# Altium PCB ECG_NEMO_final.PcbDoc (part 1 of 2)
Units mm, origin at the board's own origin, x right, y up, seen from the top; angles counter-clockwise.
Board outline 221.18 x 156.18 mm, 4 copper layers (Top Layer, Signal Layer 1, Signal Layer 2, Bottom Layer), stack 0.778 mm thick; 203 components, 106 nets, 642 pads, 55 vias.
Unrouted connection lines stored in the file: 130.
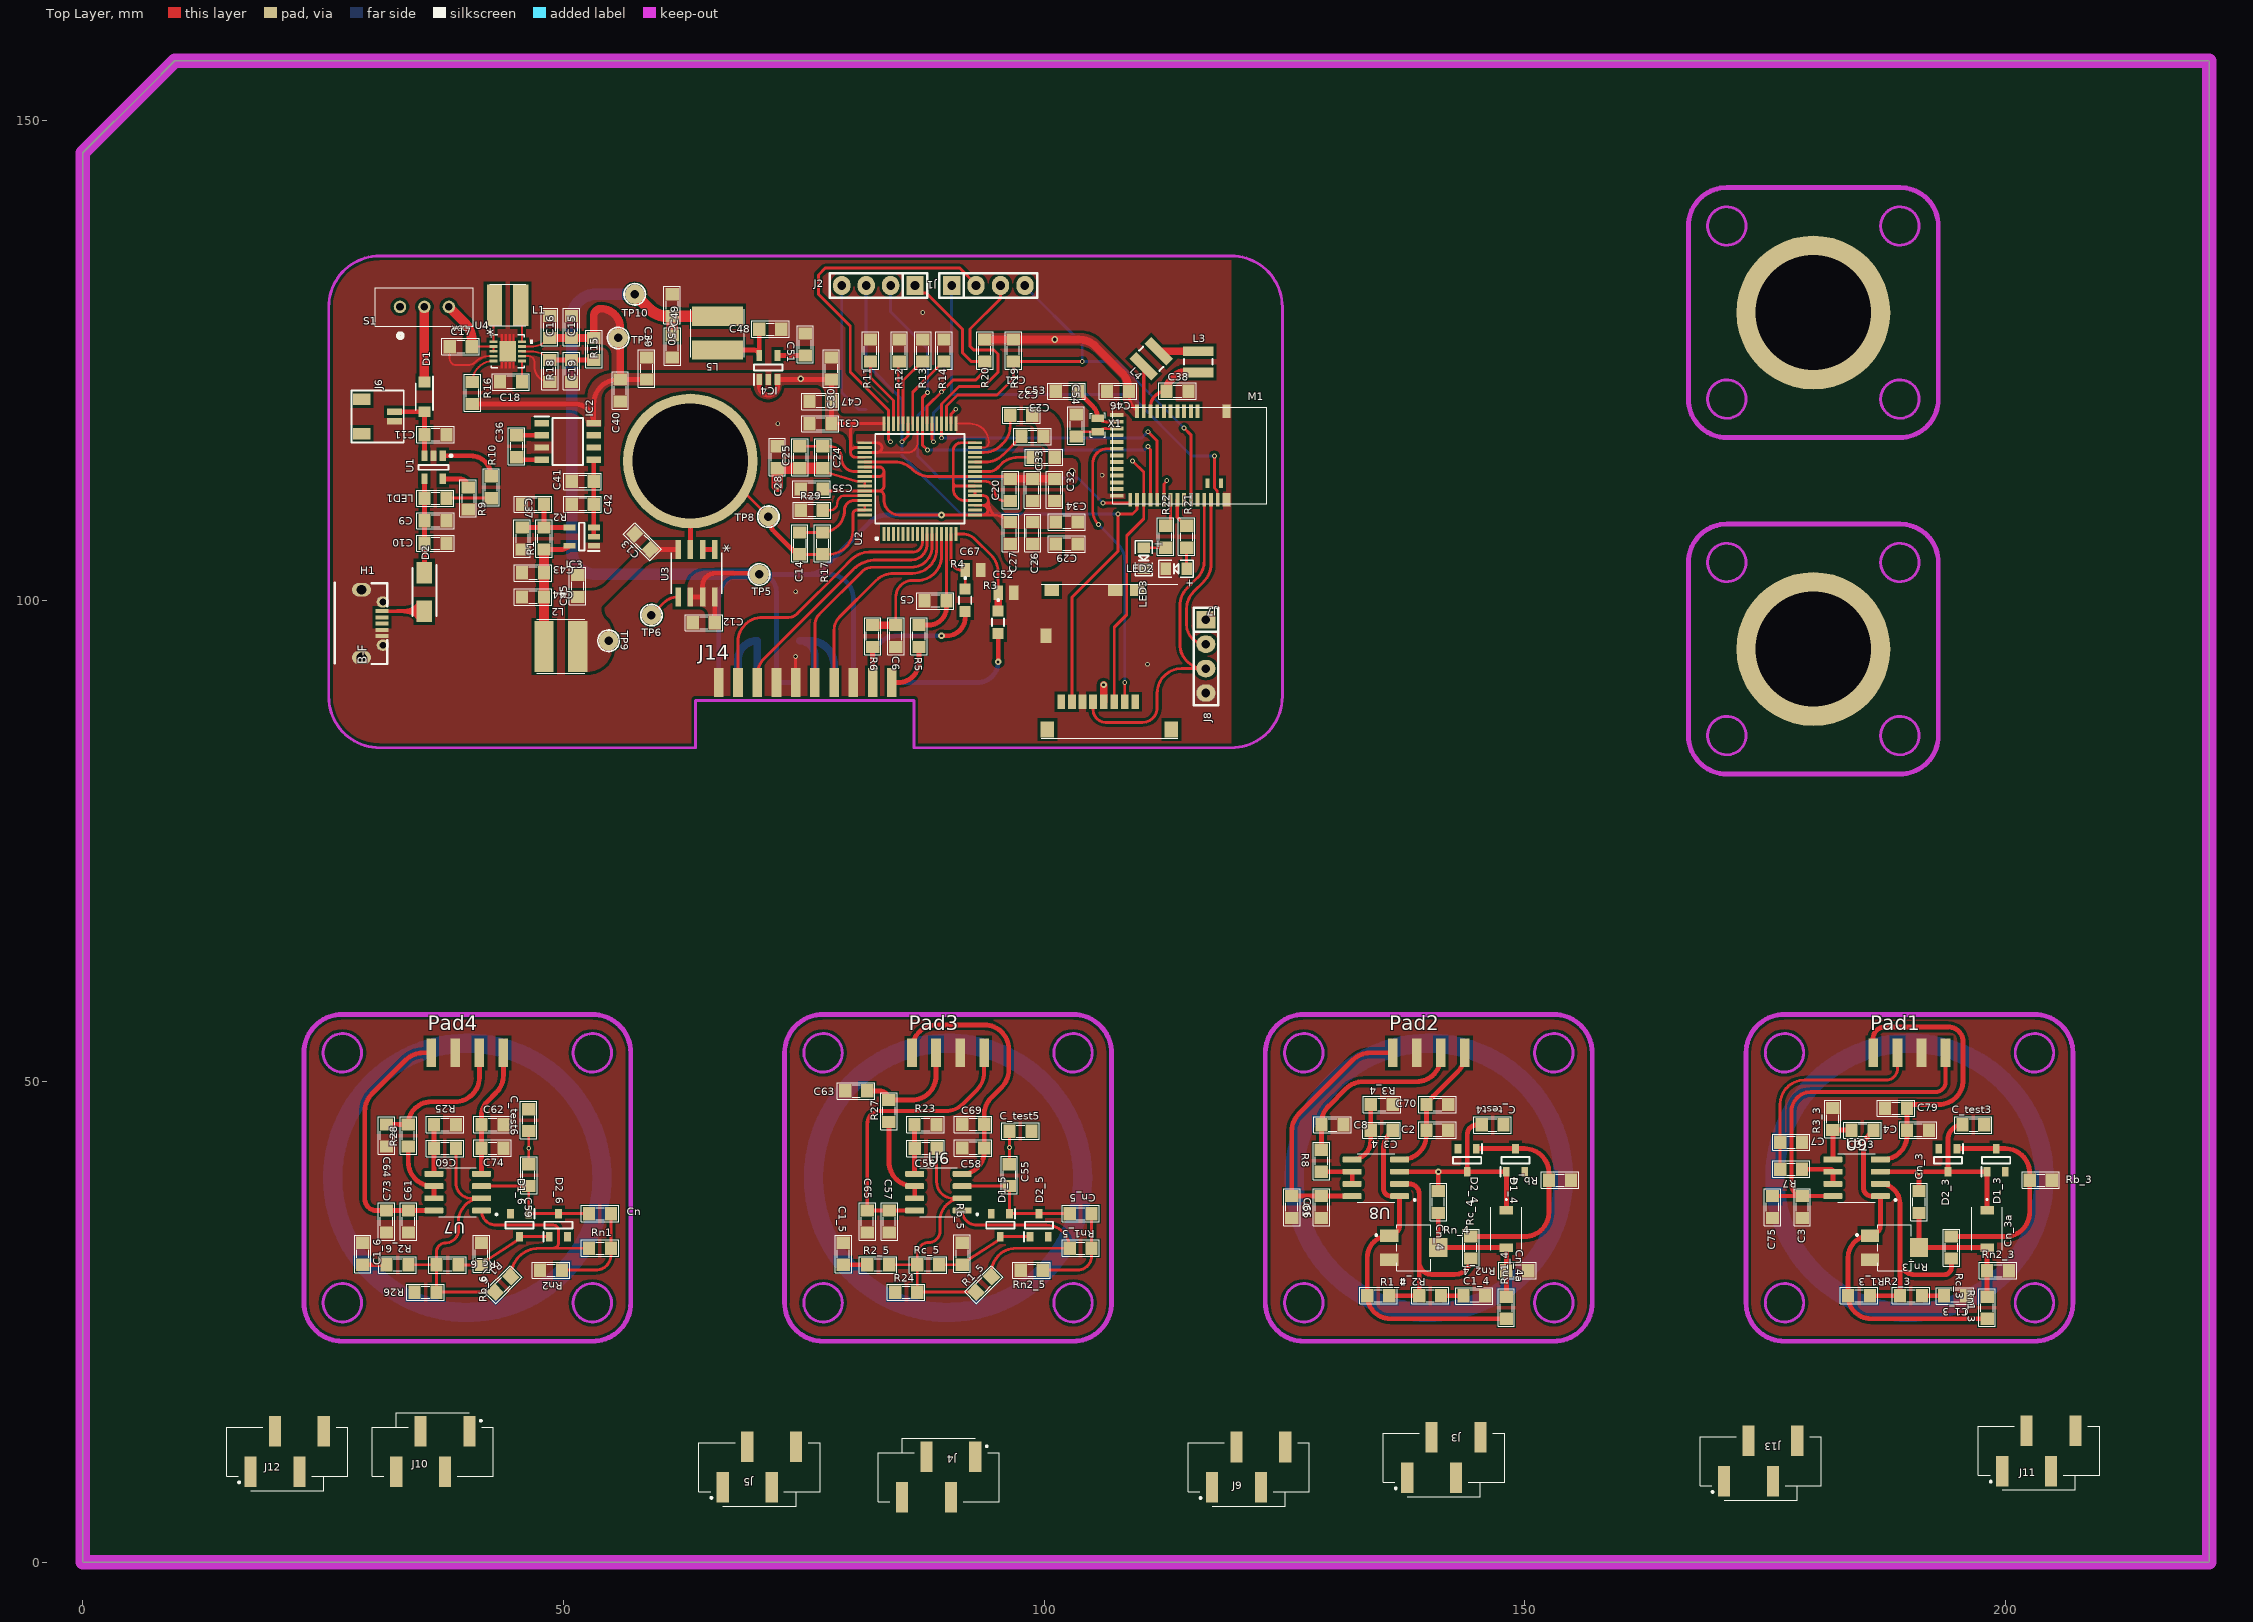
[diagram p0: Top Layer view]
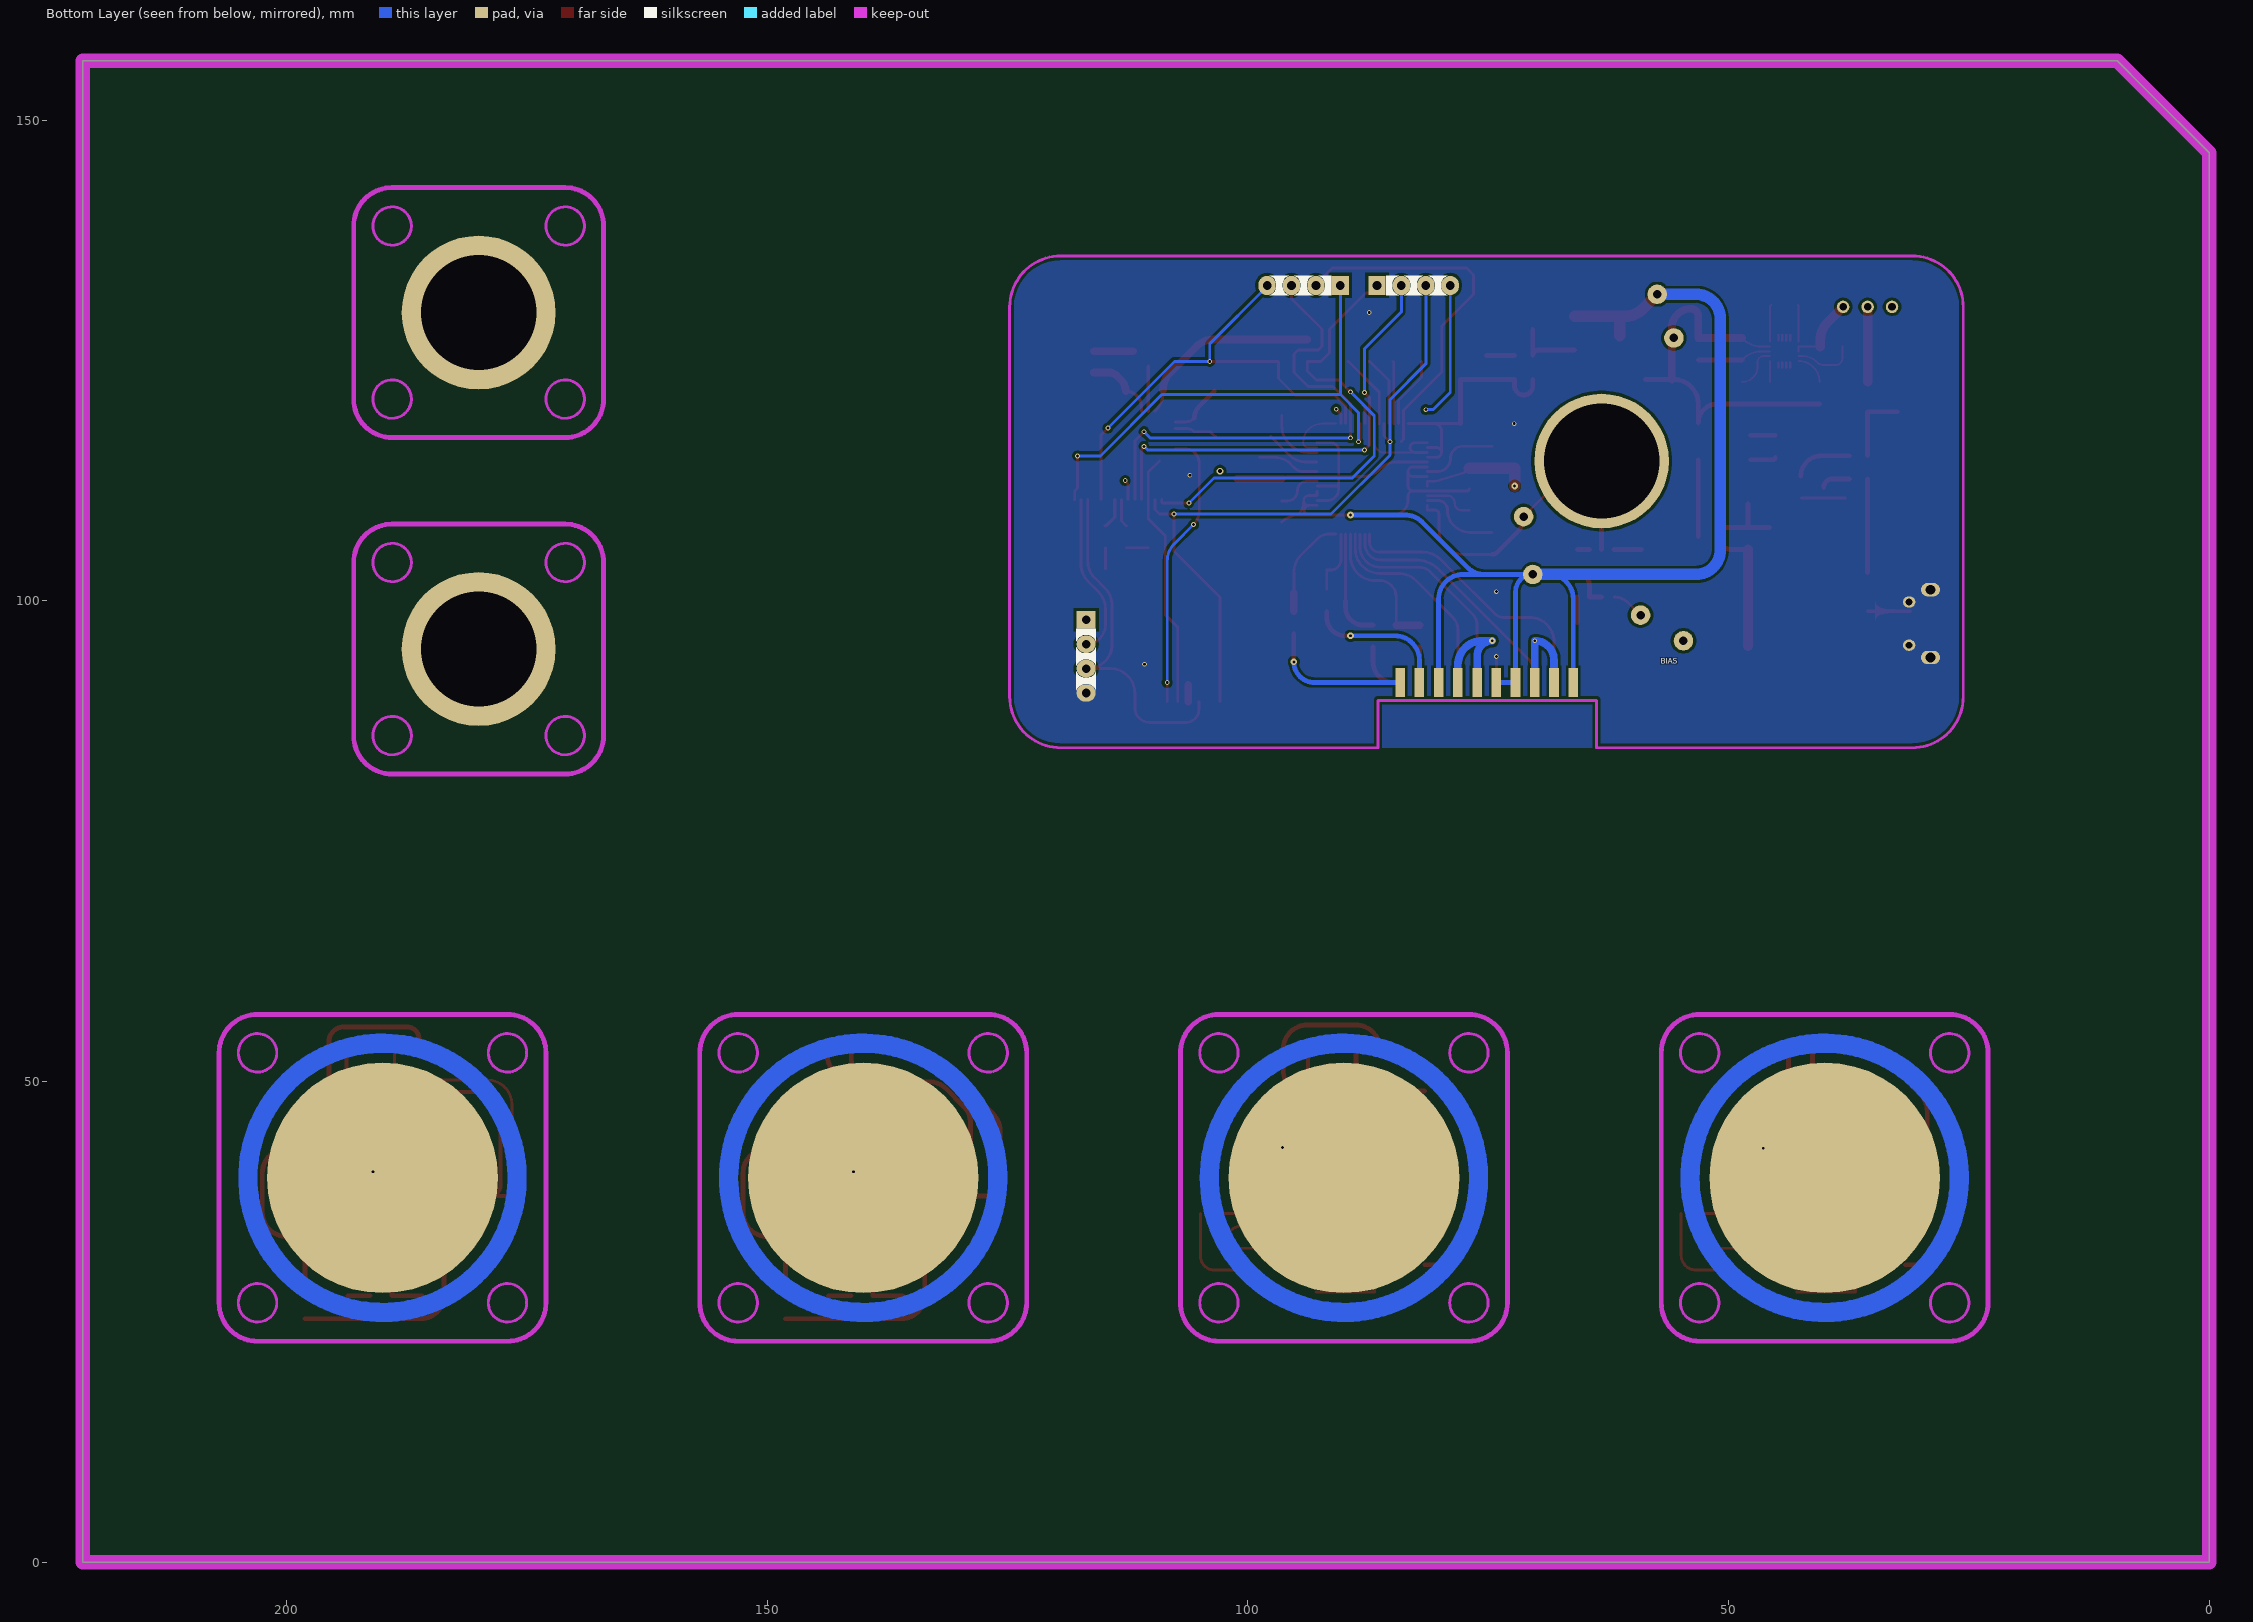
[diagram p1: Bottom Layer view, seen from below]
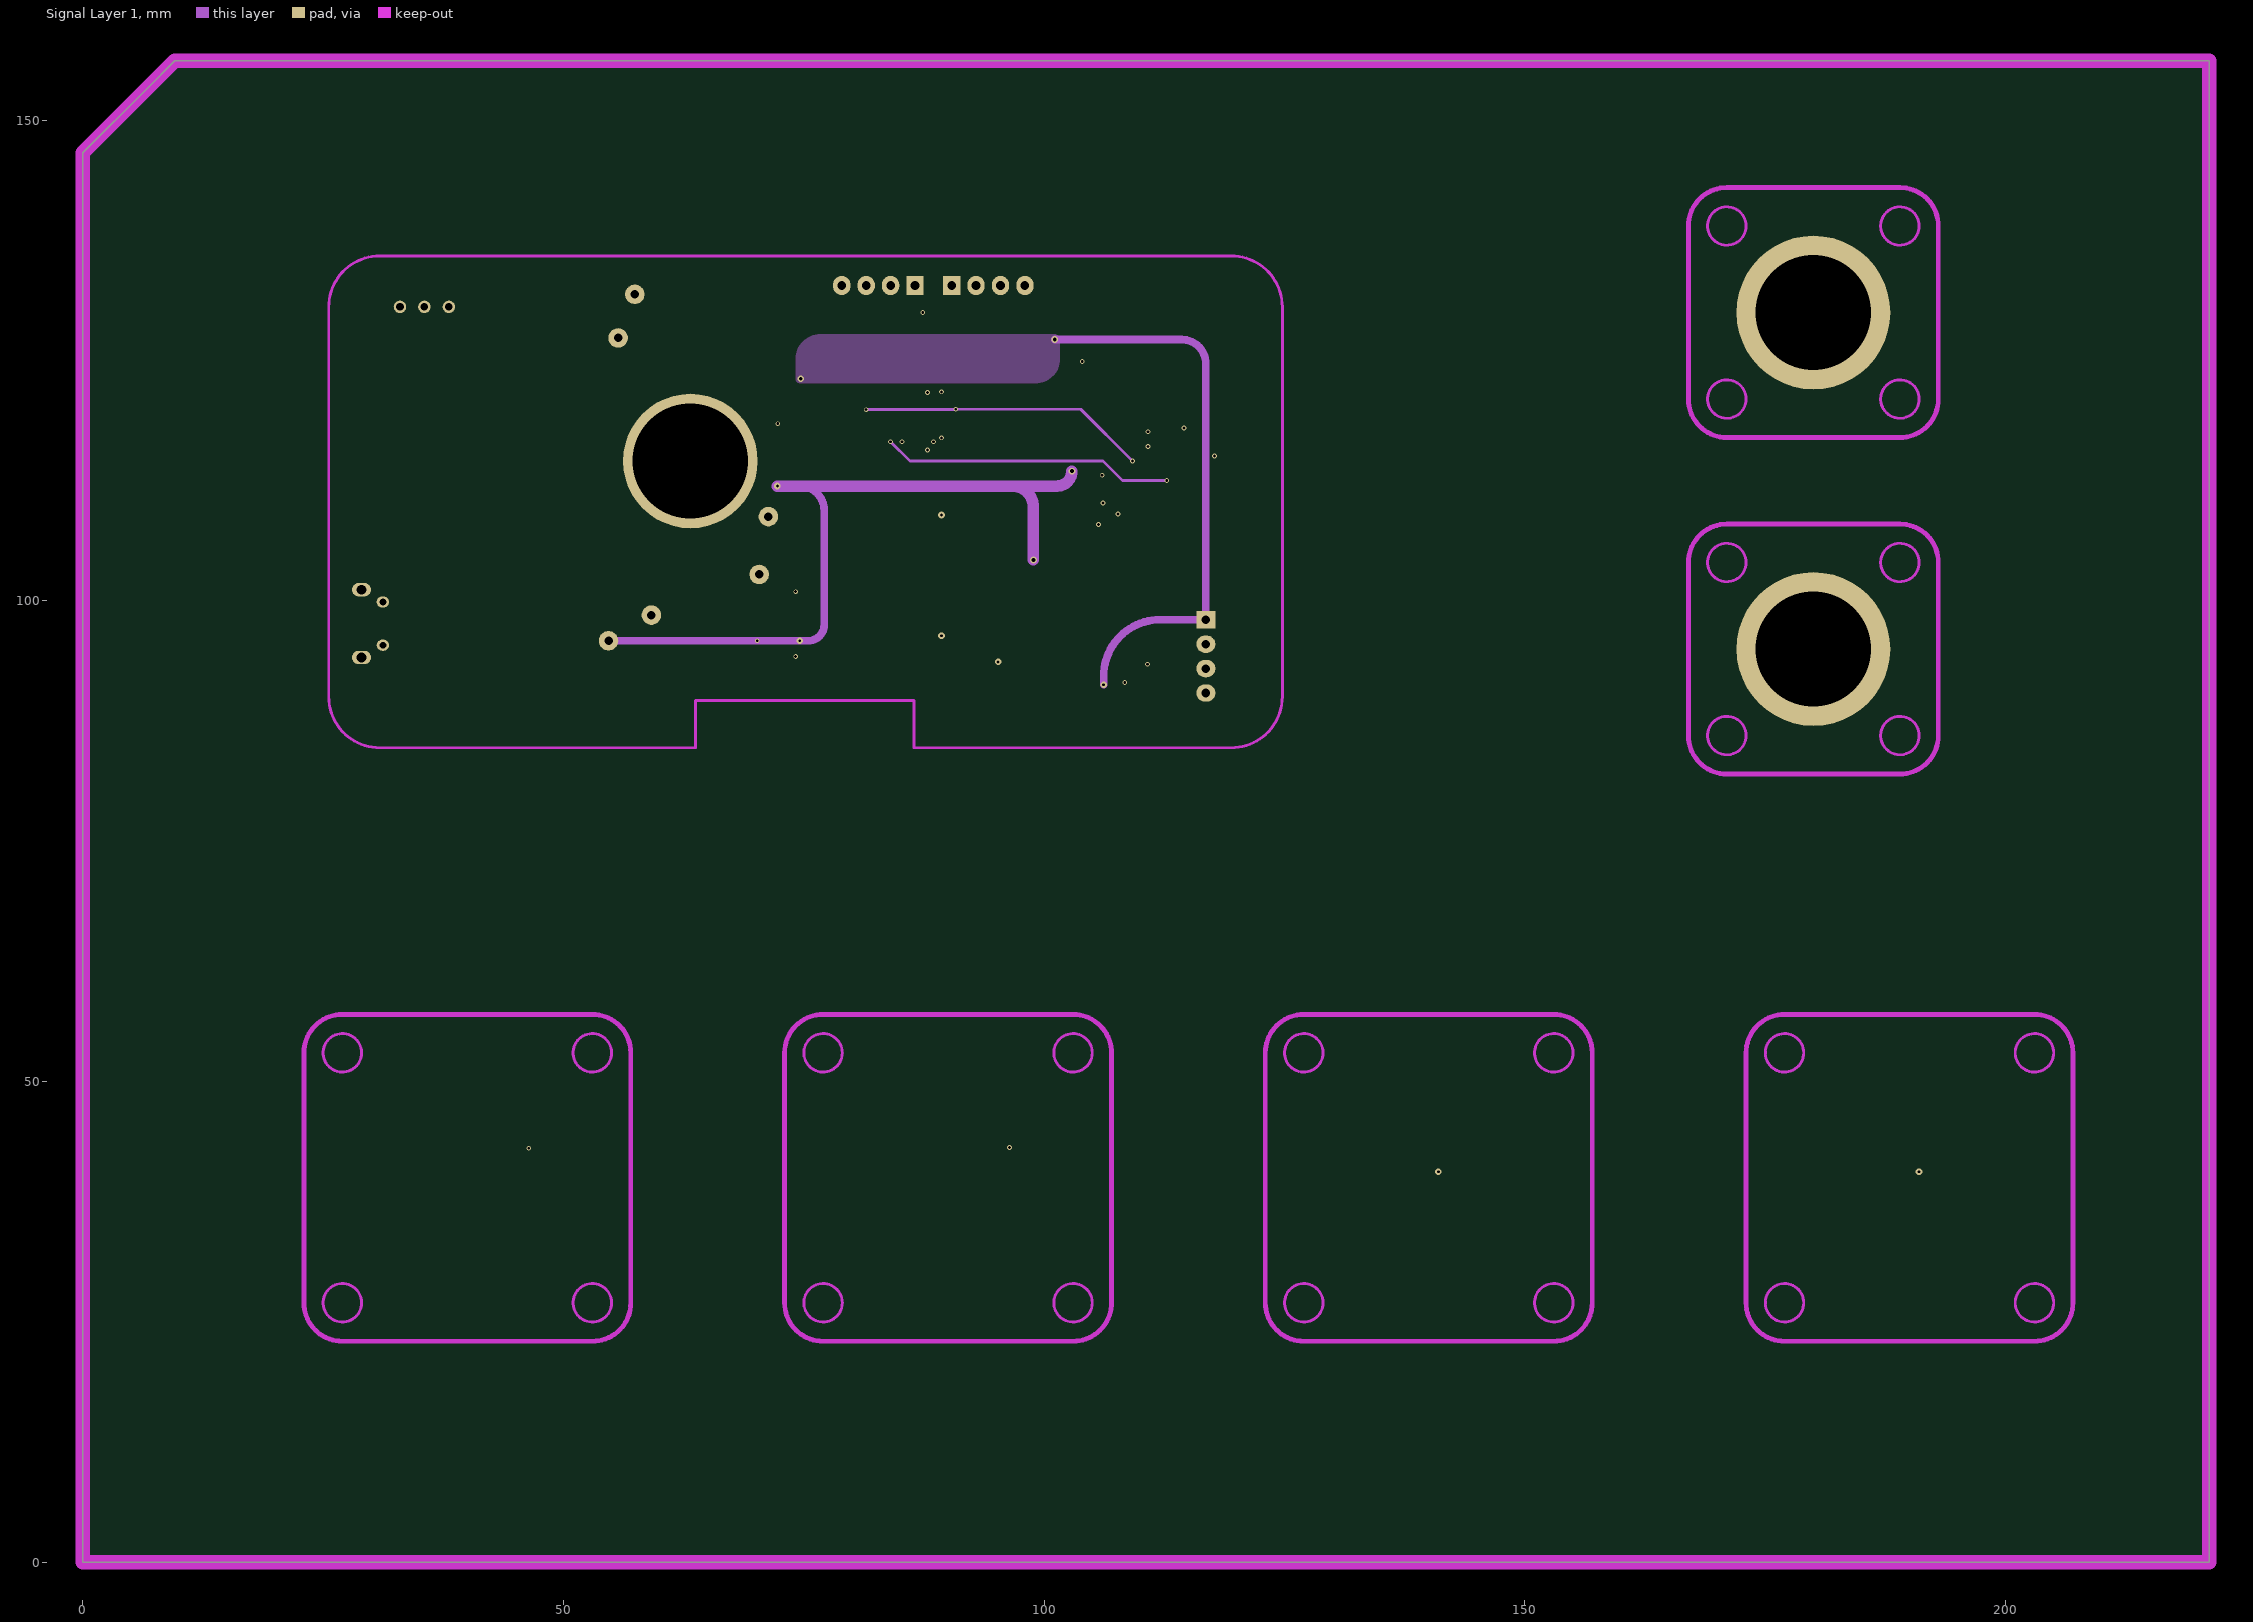
[diagram p2: Signal Layer 1]
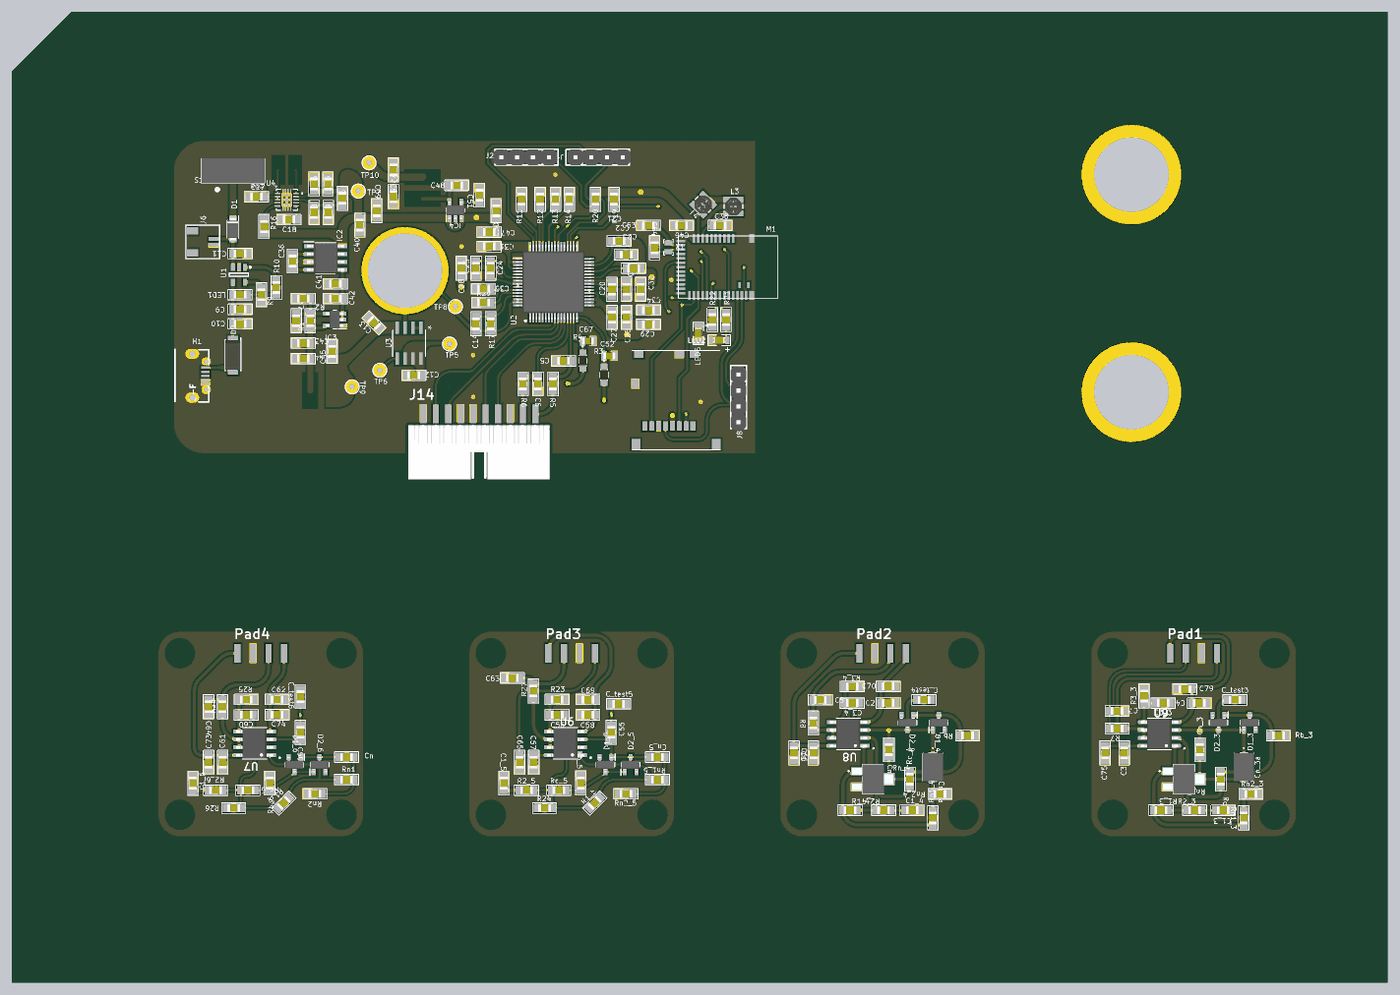
[diagram p4: 3D render of the assembled board from above, using the file's embedded part models]

## Layer stack, top to bottom
Top Solder: solder mask 0.0102, Solder Resist, Dk 3.5
Top Layer: signal copper 0.0356
Dielectric 1: core 0.254, FR-4, Dk 4.2
Signal Layer 1: signal copper 0.036
Dielectric 3: prepreg 0.127, Dk 4.2
Signal Layer 2: signal copper 0.036
Dielectric 2: core 0.254, Dk 4.2
Bottom Layer: signal copper 0.0356
Solder Side: solder mask 0.0102, Solder Resist, Dk 3.5

## Board outline
0,0 221.175,0 221.175,156.185 9.576,156.185 6.706,153.314 0,146.609

## Design rules (kind name [scope] priority, off if disabled: settings)
Clearance Clearance_5mils [TouchesRoom('Driver') and OnTopLayer] p1 off: gap=0.127 ignorepadtopadclearanceinfootprint=FALSE except(0: Arc-Hole Track-Hole SMDPad-Hole THPad-Hole Via-Hole Fill-Hole Poly-Hole Region-Hole Text-Hole)
Clearance Clearance_5.7mils [TouchesRoom('FETs')] p2 off: gap=0.145 ignorepadtopadclearanceinfootprint=FALSE except(0: Arc-Hole Track-Hole SMDPad-Hole THPad-Hole Via-Hole Fill-Hole Poly-Hole Region-Hole Text-Hole)
Clearance Clearance_keepout [OnLayer('Keep-Out Layer')] p3 off: gap=0.711 ignorepadtopadclearanceinfootprint=FALSE except(0: Arc-Hole Track-Hole SMDPad-Hole THPad-Hole Via-Hole Fill-Hole Poly-Hole Region-Hole Text-Hole)
Clearance [All] p4: gap=0.2 ignorepadtopadclearanceinfootprint=FALSE except(0.16: SMDPad-THPad; 0.3: Arc-Fill Arc-Poly Arc-Region Track-Fill Track-Poly Track-Region SMDPad-Fill SMDPad-Poly SMDPad-Region THPad-Fill THPad-Poly THPad-Region Via-Fill Via-Poly Via-Region Fill-Fill Fill-Poly Fill-Region Poly-Poly Poly-Region Region-Region)
ComponentClearance [All] p1: gap=0.3 collisioncheckmode=3 verticalgap=0.3 showdistances=TRUE
HoleSize [All] p1: absolutevalues=TRUE maxlimit=10 minlimit=0.025 maxpercent=80.000 minpercent=20.000
HoleToHoleClearance [All] p1: gap=0.241 allowstackedmicrovias=TRUE
MinimumSolderMaskSliver [All] p1 off: minsoldermaskwidth=0.254
PlaneConnect [All] p1: planeconnectstyle=Direct reliefexpansion=0.508 reliefentries=4 reliefconductorwidth=0.254 reliefairgap=0.254
PolygonConnect [All] p1: connectstyle=Direct reliefconductorwidth=0.254 reliefentries=4 polygonreliefangle="90 Angle" airgapwidth=0.254
RoutingVias [All] p1: holewidth=0.3 width=0.5 viastyle="Through Hole" minholewidth=0.178 minwidth=0.351 maxholewidth=0.508 maxwidth=0.762
SilkToSilkClearance [All] p1 off: silktosilkclearance=0.254
SilkToSolderMaskClearance [IsPad] p1 off: minsilkscreentomaskgap=0.254 clearancetoexposedcopper=TRUE
SolderMaskExpansion [All] p1: expansion=0.102 istentingtop=FALSE
UnpouredPolygon [All] p1 off:
Width [All] p1: maxlimit=3 minlimit=0.2 preferedwidth=0.3
22 further rules are at their usual default settings.

## Components (designator, comment, footprint, x,y, rotation, side; value= is the part's Value field where it differs from the comment)
C1 "103" SM-0805 125.75,36.952 r90 top
C1_3 "100u" SM-0805 194.741,27.737 r0 top value=103
C1_4 "100u" SM-0805 144.741,27.737 r0 top value=103
C1_5 "100u" SM-0805 79.108,32.103 r90 top value=103
C1_6 "100u" SM-0805 29.108,32.094 r90 top value=103
C2 "103" SM-0805 140.893,44.964 r180 top
C3 "103" SM-0805 178.833,36.952 r90 top
C3_3 "220n" SM-0805 185.107,44.964 r0 top value=103
C3_4 "220n" SM-0805 135.107,44.964 r0 top value=103
C4 "103" SM-0805 190.893,44.964 r180 top
C5 "4.7nF" SM-0805 88.681,100.025 r0 top value=103
C6 "4.7nF" SM-0805 84.562,96.342 r90 top value=103
C7 "4.7nF" SM-0805 177.69,43.688 r180 top value=103
C8 "4.7nF" SM-0805 129.976,45.5 r180 top value=103
C9 "47uF" SM-0805 36.674,108.33 r180 top value=103
C10 "4uF/10V" SM-0805 36.674,105.994 r180 top value=103
C11 "4uF/10V" SM-0805 36.674,117.308 r180 top value=103
C12 "0.1uF" SM-0805 64.595,97.727 r180 top value=103
C13 "0.1uF" SM-0805 58.221,106.157 r315 top value=103
C14 "1nF" SM-0805 74.589,105.991 r270 top value=103
C15 "22uF" SM-0805 50.83,128.499 r270 top value=103
C16 "22uF" SM-0805 48.575,128.499 r270 top value=103
C17 "10uF" SM-0805 39.306,126.462 r0 top value=103
C18 "0.1uF" SM-0805 44.531,122.784 r0 top value=103
C19 "10pF" SM-0805 50.83,123.927 r90 top value=103
C20 "10uF" SM-0805 96.469,111.553 r90 top value=103
C21 "1uF" SM-0805 97.612,119.305 r180 top value=103
C22 "100uF" SM-0805 98.78,117.123 r0 top value=103
C23 "1uF" SM-0805 99.948,114.941 r180 top value=103
C24 "1uF" SM-0805 76.964,114.953 r90 top value=103
C25 "0.1uF" SM-0805 74.589,114.953 r90 top value=103
C26 "1uF" SM-0805 98.793,107.068 r90 top value=103
C27 "0.1uF" SM-0805 96.469,107.068 r90 top value=103
C28 "1uF" SM-0805 72.24,114.953 r270 top value=103
C29 "0.1uF" SM-0805 102.335,105.925 r180 top value=103
C30 "1uF" SM-0805 77.866,124.181 r270 top value=103
C31 "0.1uF" SM-0805 76.723,118.438 r0 top value=103
C32 "1uF" SM-0805 101.091,111.553 r270 top value=103
C33 "0.1uF" SM-0805 98.793,111.553 r270 top value=103
C34 "1uF" SM-0805 102.335,108.211 r180 top value=103
C35 "0.1uF" SM-0805 75.821,111.648 r0 top value=103
C36 "1uF" SM-0805 45.129,116.083 r270 top value=103
C37 "0.01uF" SM-0805 45.713,106.492 r270 top value=103
C38 "1uF" SM-0805 113.851,121.823 r180 top value=103
C39 "10uF" SM-0805 58.649,124.181 r270 top value=103
C40 "1uF" SM-0805 55.895,121.895 r90 top value=103
C41 "10uF" SM-0805 52.006,112.44 r0 top value=103
C42 "2.2uF" SM-0805 52.006,110.078 r0 top value=103
C43 "2.2uF" SM-0805 46.831,102.912 r0 top value=103
C44 "1uF" SM-0805 46.831,100.411 r0 top value=103
C45 "10uF" SM-0805 51.474,101.554 r270 top value=103
C46 "10uF" SM-0805 107.671,121.823 r0 top value=103
C47 "1uF" SM-0805 76.723,120.769 r0 top value=103
C48 "1uF" SM-0805 71.501,128.27 r180 top value=103
C49 "10uF" SM-0805 61.316,126.467 r90 top value=103
C50 "0.1uF" SM-0805 61.316,130.754 r270 top value=103
C51 "1uF" SM-0805 75.159,126.681 r270 top value=103
C52 "VJ0805Y472KXAMC" CAPC2012X145N 96.034,100.86 r180 top
C53 "12pF" SM-0805 102.337,121.823 r0 top value=103
C54 "12pF" SM-0805 103.335,118.237 r270 top value=103
C55 "103" SM-0805 96.381,40.278 r270 top
C56 "220n" SM-0805 87.673,43.077 r0 top value=103
C57 "103" SM-0805 83.878,35.452 r90 top
C58 "103" SM-0805 92.613,43.102 r0 top
C59 "103" SM-0805 46.381,40.278 r90 top
C60 "220n" SM-0805 37.673,43.077 r0 top value=103
C61 "103" SM-0805 33.878,35.452 r90 top
C62 "103" SM-0805 42.613,45.541 r180 top
C63 "4.7nF" SM-0805 80.449,49.04 r0 top value=103
C64 "4.7nF" SM-0805 31.592,44.398 r90 top value=103
C65 "103" SM-0805 81.592,35.452 r90 top
C66 "103" SM-0805 128.833,36.952 r90 top
C67 "VJ0805Y472KXAMC" CAPC2012X145N 92.604,103.226 r180 top
C69 "103" SM-0805 92.613,45.566 r0 top
C70 "103" SM-0805 140.893,47.625 r180 top
C73 "103" SM-0805 31.592,35.452 r90 top
C74 "103" SM-0805 42.613,43.077 r180 top
C75 "103" SM-0805 175.75,36.952 r90 top
C79 "103" SM-0805 188.607,47.25 r0 top
C_test3 "1p" SM-0805 196.643,45.5 r0 top value=103
C_test4 "1p" SM-0805 146.643,45.5 r0 top value=103
C_test5 "1p" SM-0805 97.524,44.855 r180 top value=103
C_test6 "1p" SM-0805 46.381,45.998 r270 top value=103
Cn "4p" SM-0805 53.789,36.276 r180 top value=103
Cn_3 "4p" SM-0805 190.992,37.492 r90 top value=103
Cn_3a "4p" JZ100 198.068,34.691 r270 top
Cn_4 "4p" SM-0805 140.992,37.492 r90 top value=103
Cn_4a "4p" JZ100 148.068,34.691 r270 top
Cn_5 "4p" SM-0805 103.789,36.276 r180 top value=103
D1 "SS34FA" SODFL3618X143N 35.531,121.234 r270 top
D1_3 "BAS21" SOT95P240X120-3N 199.018,41.835 r90 top
D1_4 "BAS21" SOT95P240X120-3N 149.018,41.835 r90 top
D1_5 "BAS21" SOT95P240X120-3N 95.431,35.076 r270 top
D1_6 "BAS21" SOT95P240X120-3N 45.431,35.076 r270 top
D2 "N4007" DIOM5025X220N 35.531,100.946 r270 top
D2_3 "BAS21" SOT95P240X120-3N 194,41.835 r270 top
D2_4 "BAS21" SOT95P240X120-3N 144,41.835 r270 top
D2_5 "BAS21" SOT95P240X120-3N 99.47,35.076 r90 top
D2_6 "BAS21" SOT95P240X120-3N 49.47,35.076 r90 top
H1 "USB B Micro/Mini" "USB-B-MICRO-female Tai02" 28.515,97.946 r90 top
IC2 "LM2660MX_NOPB" SOIC127P600X175-8N 50.438,116.591 r0 top
IC3 "TPS72301DDCT" SOT95P280X110-5N 51.899,106.685 r180 top
IC4 "LDK130M25R" SOT95P280X145-5N 71.308,124.288 r90 top
J1 "Test1" sip4 94.183,132.817 r0 top value="Connector 4x2"
J2 "Test2" sip4 82.753,132.817 r180 top value="Connector 4x2"
J3 "171973-0004" 1719730004 -1128.434,-1259.1 r180 top
J4 "171973-0004" 1719730004 1359.027,1278.873 r0 top
J5 "171973-0004" 1719730004 -1199.617,-1260.086 r180 top
J6 "Jumper 2" "J2_Jst SH_1mm" 32.415,119.68 r270 top value="JP 2"
J7 "502570-0893" MOLEX_502570-0893 106.782,93.726 r180 top
J8 "Loading" SIP4 116.815,94.234 r270 top value="Connector 4x2"
J9 "171973-0004" 1719730004 -1148.73,-1260.1 r180 top
J10 "171973-0004" 1719730004 1306.405,1281.524 r0 top
J11 "171973-0004" 1719730004 -1066.546,-1258.4 r180 top
J12 "171973-0004" 1719730004 -1248.74,-1258.476 r180 top
J13 "171973-0004" 1719730004 -1095.477,-1259.467 r180 top
J14 "DF11-20DP-2DSA_01_" "20P 2.5MM" 84.149,91.516 r180 top
L1 "1.5uH, 1.75A" WE-TPC_381692 1314.183,1400.784 r0 top
L2 "3.3 uH, 1.95A" WE-TPC_4818/482892 1319.724,1365.275 r0 top
L3 "10 uH, 1 A" WE-TPC_2828 116.013,124.866 r0 top
L4 "15 uH, 0.72 A" WE-TPC_2828 111.129,125.189 r135 top
L5 "3.3 uH, 1.95A" WE-TPC_4818/482892 -1203.985,1397.861 r90 top
LED1 "LED" SM-0805 36.674,110.693 r0 top value="LED 3 ly Single Colour"
LED2 "LED" led0805 113.719,103.353 r180 top value="LED 3 ly Single Colour"
LED3 "LED" led0805 110.351,104.445 r270 top value="LED 3 ly Single Colour"
M1 "MODULE_MDBT42Q" PCB_MDBT42Q_10X16 123.151,115.136 r270 top
Pad1 "4P pad" "04P 2.5MM" 190,53 r180 top
Pad2 "4P pad" "04P 2.5MM" 140,53 r180 top locked
Pad3 "4P pad" "04P 2.5MM" 90,53 r180 top
Pad4 "4P pad" "04P 2.5MM" 40,53 r180 top
R1 "100k" SM-0805 47.974,106.492 r270 top value="R1/4W - 1K"
R1_3 "1M" SM-0805 184.749,27.737 r180 top value="R1/4W - 1K"
R1_4 "1M" SM-0805 134.749,27.737 r180 top value="R1/4W - 1K"
R1_5 "1M" SM-0805 93.704,28.914 r45 top value="R1/4W - 1K"
R1_6 "1M" SM-0805 43.704,28.914 r45 top value="R1/4W - 1K"
R2 "100k" SM-0805 46.831,110.078 r0 top value="R1/4W - 1K"
R2_3 "100k" SM-0805 190.143,27.737 r180 top value="R1/4W - 1K"
R2_4 "100k" SM-0805 140.143,27.737 r180 top value="R1/4W - 1K"
R2_5 "100k" SM-0805 82.735,30.96 r0 top value="R1/4W - 1K"
R2_6 "100k" SM-0805 32.735,30.96 r0 top value="R1/4W - 1K"
R3 "ERJ-HP6D4991V" ERJHP6D1000V 95.214,97.79 r270 top
R3_3 "10M" SM-0805 182.03,46.107 r270 top value="R1/4W - 1K"
R3_4 "10M" SM-0805 135.107,47.625 r180 top value="R1/4W - 1K"
R4 "ERJ-HP6D4991V" ERJHP6D1000V 91.784,100.076 r270 top
R5 "4.99k" SM-0805 86.974,96.342 r90 top value="R1/4W - 1K"
R6 "4.99k" SM-0805 82.149,96.342 r90 top value="R1/4W - 1K"
R7 "4.99k" SM-0805 177.69,40.889 r180 top value="R1/4W - 1K"
R8 "4.99k" SM-0805 128.833,41.778 r90 top value="R1/4W - 1K"
R9 "2k" SM-0805 40.096,110.667 r270 top value="R1/4W - 1K"
R10 "470" SM-0805 42.477,111.836 r90 top value="R1/4W - 1K"
R11 "10k" SM-0805 81.934,126.052 r90 top value="R1/4W - 1K"
R12 "10k" SM-0805 84.906,126.052 r90 top value="R1/4W - 1K"
R13 "10k" SM-0805 87.37,126.052 r90 top value="R1/4W - 1K"
R14 "10k" SM-0805 89.58,126.052 r90 top value="R1/4W - 1K"
R15 "666k" SM-0805 53.149,126.213 r90 top value="R1/4W - 1K"
R16 "1M" SM-0805 40.532,121.641 r270 top value="R1/4W - 1K"
R17 "499k, 01%" SM-0805 76.964,105.991 r270 top value="R1/4W - 1K"
R18 "111k" SM-0805 48.575,123.927 r90 top value="R1/4W - 1K"
R19 "10k" SM-0805 96.793,126.052 r90 top value="R1/4W - 1K"
R20 "10k" SM-0805 93.821,126.052 r90 top value="R1/4W - 1K"
R21 "1k" SM-0805 114.811,106.68 r270 top value="R1/4W - 1K"
R22 "1k" SM-0805 112.627,106.68 r270 top value="R1/4W - 1K"
R23 "10M" SM-0805 87.648,45.541 r180 top value="R1/4W - 1K"
R24 "100" SM-0805 85.652,28.106 r0 top value="R1/4W - 1K"
R25 "10M" SM-0805 37.673,45.541 r180 top value="R1/4W - 1K"
R26 "100" SM-0805 35.652,28.106 r0 top value="R1/4W - 1K"
R27 "4.99k" SM-0805 83.851,46.938 r90 top value="R1/4W - 1K"
R28 "4.99k" SM-0805 33.851,44.398 r90 top value="R1/4W - 1K"
R29 "1k" SM-0805 75.821,109.423 r180 top value="R1/4W - 1K"
Rb_3 "10M" SM-0805 203.643,39.75 r180 top value="R1/4W - 1K"
Rb_4 "10M" SM-0805 153.643,39.75 r180 top value="R1/4W - 1K"
Rb_5 "10M" SM-0805 91.47,32.103 r270 top value="R1/4W - 1K"
Rb_6 "10M" SM-0805 41.47,32.094 r270 top value="R1/4W - 1K"
Rc_3 "100k" SM-0805 194.36,32.741 r90 top value="R1/4W - 1K"
Rc_4 "100k" SM-0805 144.36,32.741 r90 top value="R1/4W - 1K"
Rc_5 "100k" SM-0805 87.938,30.96 r0 top value="R1/4W - 1K"
Rc_6 "100k" SM-0805 37.938,30.951 r0 top value="R1/4W - 1K"
Rn1 "420k" SM-0805 53.789,32.678 r180 top value="R1/4W - 1K"
Rn1_3 "420k" SM-0805 198.068,26.492 r270 top value="R1/4W - 1K"
Rn1_4 "420k" SM-0805 148.068,26.492 r270 top value="R1/4W - 1K"
Rn1_5 "420k" SM-0805 103.789,32.678 r180 top value="R1/4W - 1K"
Rn2 "80k" SM-0805 48.709,30.392 r0 top value="R1/4W - 1K"
Rn2_3 "80k" SM-0805 199.211,30.344 r180 top value="R1/4W - 1K"
Rn2_4 "80k" SM-0805 149.211,30.344 r180 top value="R1/4W - 1K"
Rn2_5 "80k" SM-0805 98.709,30.392 r0 top value="R1/4W - 1K"
Rn_3 "3224X-1-105E" 3224X1502E 188.442,32.741 r0 top
Rn_4 "3224X-1-105E" 3224X1502E 138.442,32.741 r0 top
S1 "SS12SDP2" SS12SDP2 35.531,130.593 r90 top
TP5 "TP" TP1 70.358,102.756 r180 top value="Test Point"
TP6 "TP" TP1 59.142,98.524 r180 top value="Test Point"
TP7 "TP" TP1 55.689,127.356 r180 top value="Test Point"
TP8 "TP" TP1 71.308,108.769 r180 top value="Test Point"
TP9 "TP" TP1 54.686,95.86 r270 top value="Test Point"
TP10 "TP" TP1 57.413,131.897 r0 top value="Test Point"
U1 "MCP73832T-2ACI/OT" SOT-23-OT5_N 36.481,113.899 r270 top
U2 "Part Number: ADS1299IPAGR" QFP50P1200X1200X120-64N 87.074,112.7 r90 top value=Value
U3 "OPA2376AIDR" D8 63.833,102.885 r270 top value=Value
U4 "Part Number: TPS63060DSCR" DSC10_1P70X2P15 44.199,125.962 r0 top value=Value
U6 "LMC6442" SOIC127P599X175-8N 89,38.5 r180 top
U7 "LMC6442" SOIC127P599X175-8N 39,38.5 r180 top
U8 "LMC6442" SOIC127P599X175-8N 134.5,40 r180 top
U9 "LMC6442" SOIC127P599X175-8N 184.5,40 r180 top
X1 "32.768kHz" "Crystal 32.768kHz SMD" 105.571,117.502 r90 top value=4Mhz

## Footprints (in the part's own frame and the unit in brackets; to place one, negate y for a bottom-side part, rotate by r counter-clockwise, add the part's x,y. Pads: shape width x height; smd on the part's side, far side on the other; paste and mask are expansions set on the pad)
"04P 2.5MM" [mm]
  rect 1x3 smd: 1(-3.75,0) 2(-1.25,0) 3(1.25,0) 4(3.75,0)
"20P 2.5MM" [mm]
  rect 1x3 smd: 1(0,0) 3(2,0) 5(4,0) 7(6,0) 9(8,0) 11(10,0) 13(12,0) 15(14,0) 17(16,0) 19(18,0)
  rect 1x3 smd far side: 2(0,0) 4(2,0) 6(4,0) 8(6,0) 10(8,0) 12(10,0) 14(12,0) 16(14,0) 18(16,0) 20(18,0)
  body extent -2.31,1.73 20.39,10.53, height 3.51
3224X1502E [mm]
  rect 1.9x1.3 smd: 1(-2.55,1.25) 3(-2.55,-1.25)
  rect 1.9x2 smd: 2(2.55,0)
  silkscreen extent -4,-2.4 1.75,2.4, body extent -3.37,-2.4 3.31,2.4, height 5.1
1719730004 [mm]
  rect 1.27x3.18 smd: 1(-1266.19,-1267.9) 2(-1268.73,-1272.1) 3(-1271.27,-1267.9) 4(-1273.81,-1272.1)
  silkscreen extent -1276.31,-1272.55 -1263.69,-1265.95
CAPC2012X145N [mm]
  rect 0.99x1.47 smd: 1(-0.82,0) 2(0.82,0)
  body extent -1,-0.63 1,0.63, height 1.45
"Crystal 32.768kHz SMD" [mm]
  rect 0.8x1.3 smd: 1(0.1,0) 2(1.5,0)
  silkscreen extent -0.45,-0.8 2.05,0.8
D8 [mil]
  rect 78x22 smd paste+0 mask+0: 1(-97,75) 2(-97,25) 3(-97,-25) 4(-97,-75) 5(97,-75) 6(97,-25) 7(97,25) 8(97,75)
  silkscreen extent -83,-104 84,104, body extent 0,0 10,10, height 10
DIOM5025X220N [mm]
  rect 2.25x1.6 smd: 1(-2,0) 2(2,0)
  silkscreen extent -2.8,-1.25 2.5,1.25, body extent -2.5,-1.25 2.5,1.25, height 2.2
DSC10_1P70X2P15 [mm]
  rect 0.85x0.28 smd: 1(-1.475,1) 2(-1.475,0.5) 3(-1.475,0) 4(-1.475,-0.5) 5(-1.475,-1) 6(1.475,-1) 7(1.475,-0.5) 8(1.475,0) 9(1.475,0.5) 10(1.475,1)
  rect 1.7x2.15 smd paste-1.062 mask-1.067: 11(0,0)
  Top Layer region: -0.1,1.775 -0.1,1.075 -0.3,1.075 -0.3,1.775
  Top Layer region: 0.1,1.775 0.1,1.075 0.3,1.075 0.3,1.775
  Top Layer region: -0.5,1.775 -0.5,1.075 -0.7,1.075 -0.7,1.775
  Top Layer region: 0.5,1.775 0.5,1.075 0.7,1.075 0.7,1.775
  Top Layer region: -0.1,-1.775 -0.1,-1.075 -0.3,-1.075 -0.3,-1.775
  Top Layer region: 0.1,-1.775 0.1,-1.075 0.3,-1.075 0.3,-1.775
  Top Layer region: -0.5,-1.775 -0.5,-1.075 -0.7,-1.075 -0.7,-1.775
  Top Layer region: 0.5,-1.775 0.5,-1.075 0.7,-1.075 0.7,-1.775
  silkscreen extent -1.7,-1.7 2.59,1.7, body extent 0,0 0.25,0.25, height 0.25
ERJHP6D1000V [mm]
  rect 1.15x1.15 smd: 1(-1.175,0) 2(1.175,0)
  silkscreen extent -2.4,-0.63 0.4,0.63, body extent -1,-0.63 1,0.63, height 0.7
"J2_Jst SH_1mm" [mm] "Jum select vdd or gnd"
  rect 1.2x1.8 smd: 0(-1.3,-3.4) 0(2.3,-3.4)
  rect 0.65x1.55 smd: 1(0,0) 2(1,0)
  silkscreen extent -2.2,-4.47 3.2,0.97
JZ100 [mm]
  rect 0.9x1.4 smd: 1(-1.95,0) 2(1.95,0)
  silkscreen extent -3.1,-1.6 2.25,1.6, body extent -2.31,-1.6 2.31,1.6, height 1.55
led0805 [mil]
  rect 43x50 smd: A(-43,0) K(43,0)
  silkscreen extent -71,-34 71,34, body extent -40,-26 40,24, height 43
MOLEX_502570-0893 [mm]
  rect 0.8x1.5 smd: 1(-2.7,4.2) 2(-1.6,4.2) 3(-0.5,4.2) 4(0.6,4.2) 5(1.7,4.2) 6(2.8,4.2) 7(3.9,4.2) 8(5,4.2)
  rect 1.15x1.5 smd: DL(6.575,-2.65)
  rect 1.5x1.15 smd: DS(-0.6,-7.375) SM3(-2.9,-7.375) SM4(6,-7.375)
  rect 1.4x1.7 smd: SM1(-6.45,7.1) SM2(6.45,7.1)
  silkscreen extent -7.1,-8 7.1,8
PCB_MDBT42Q_10X16 [mm]
  rect 1.4x0.8 smd mask+0: 1(-4.6,-4.2) 39(4.6,-4.2)
  rect 1.4x0.4 smd mask+0: 2(-4.6,-7.2) 3(-4.6,-7.9) 5(-4.6,-9.3) 6(-4.6,-10) 7(-4.6,-10.7) 8(-4.6,-11.4) 9(-4.6,-12.1) 10(-4.6,-12.8) 11(-4.6,-13.5) 25(4.6,-14.2) 26(4.6,-13.5) 27(4.6,-12.8) 28(4.6,-12.1) 29(4.6,-11.4) 30(4.6,-10.7) 31(4.6,-10) 32(4.6,-9.3) 33(4.6,-8.6) 34(4.6,-7.9) 35(4.6,-7.2) 36(4.6,-6.5) 37(4.6,-5.8) 38(4.6,-5.1)
  rect 1.4x0.4 smd: 4(-4.6,-8.6)
  rect 0.4x1.4 smd mask+0: 12(-4.2,-15.6) 13(-3.5,-15.6) 14(-2.8,-15.6) 15(-2.1,-15.6) 16(-1.4,-15.6) 17(-0.7,-15.6) 18(0,-15.6) 19(0.7,-15.6) 20(1.4,-15.6) 21(2.1,-15.6) 22(2.8,-15.6) 23(3.5,-15.6) 24(4.2,-15.6)
  rect 1x0.4 smd mask+0: 40(2.9,-4.75) 41(2.9,-6.15)
  silkscreen extent -5,-16 5,0
QFP50P1200X1200X120-64N [mm]
  rect 1.475x0.3 smd: 1(-5.738,3.75) 2(-5.738,3.25) 3(-5.738,2.75) 4(-5.738,2.25) 5(-5.738,1.75) 6(-5.738,1.25) 7(-5.738,0.75) 8(-5.738,0.25) 9(-5.738,-0.25) 10(-5.738,-0.75) 11(-5.738,-1.25) 12(-5.738,-1.75) 13(-5.738,-2.25) 14(-5.738,-2.75) 15(-5.738,-3.25) 16(-5.738,-3.75) 33(5.738,-3.75) 34(5.738,-3.25) 35(5.738,-2.75) 36(5.738,-2.25) 37(5.738,-1.75) 38(5.738,-1.25) 39(5.738,-0.75) 40(5.738,-0.25) 41(5.738,0.25) 42(5.738,0.75) 43(5.738,1.25) 44(5.738,1.75) 45(5.738,2.25) 46(5.738,2.75) 47(5.738,3.25) 48(5.738,3.75)
  rect 0.3x1.475 smd: 17(-3.75,-5.738) 18(-3.25,-5.738) 19(-2.75,-5.738) 20(-2.25,-5.738) 21(-1.75,-5.738) 22(-1.25,-5.738) 23(-0.75,-5.738) 24(-0.25,-5.738) 25(0.25,-5.738) 26(0.75,-5.738) 27(1.25,-5.738) 28(1.75,-5.738) 29(2.25,-5.738) 30(2.75,-5.738) 31(3.25,-5.738) 32(3.75,-5.738) 49(3.75,5.738) 50(3.25,5.738) 51(2.75,5.738) 52(2.25,5.738) 53(1.75,5.738) 54(1.25,5.738) 55(0.75,5.738) 56(0.25,5.738) 57(-0.25,5.738) 58(-0.75,5.738) 59(-1.25,5.738) 60(-1.75,5.738) 61(-2.25,5.738) 62(-2.75,5.738) 63(-3.25,5.738) 64(-3.75,5.738)
  silkscreen extent -6.35,-4.65 4.65,4.65, body extent -6,-6 6,6, height 1.2
sip4 [mm]
  rect 1.8x2 hole 0.9: 1(-3.81,0)
  oval 1.8x2 hole 0.9: 2(-1.27,0) 3(1.27,0) 4(3.81,0)
  silkscreen extent -5.08,-1.27 5.08,1.27, body extent -4.83,-1.27 5.33,1.27, height 8.54
SIP4 [mm]
  rect 1.8x2 hole 0.9: 1(-3.81,0)
  oval 1.8x2 hole 0.9: 2(-1.27,0) 3(1.27,0) 4(3.81,0)
  silkscreen extent -5.08,-1.27 5.08,1.27, body extent -4.83,-1.27 5.33,1.27, height 8.54
SM-0805 [mil]
  rect 50x55 smd: 1(-45,0) 2(45,0)
  silkscreen extent -77,-34 76,33, body extent -40,-25 40,25, height 24
SODFL3618X143N [mm]
  rect 1.12x1.22 smd: 1(-1.55,0) 2(1.55,0)
  silkscreen extent -2.11,-0.9 1.4,0.9, body extent -1.8,-0.9 1.8,0.9, height 1.43
SOIC127P599X175-8N [mm]
  rrect25% 1.97x0.6 smd: 1(-2.47,1.905) 2(-2.47,0.635) 3(-2.47,-0.635) 4(-2.47,-1.905) 5(2.47,-1.905) 6(2.47,-0.635) 7(2.47,0.635) 8(2.47,1.905)
  silkscreen extent -4.14,-2.52 1.95,2.52, body extent -3,-2.45 3,2.45, height 1.75
SOIC127P600X175-8N [mm]
  rect 1.528x0.65 smd: 1(-2.711,1.905) 2(-2.711,0.635) 3(-2.711,-0.635) 4(-2.711,-1.905) 5(2.711,-1.905) 6(2.711,-0.635) 7(2.711,0.635) 8(2.711,1.905)
  silkscreen extent -3.47,-2.45 1.6,2.58, body extent -3.01,-2.45 3.01,2.45, height 1.63
SOT95P240X120-3N [mm]
  rect 1x0.7 smd: 1(-1.2,0.95) 2(-1.2,-0.95) 3(1.2,0)
  silkscreen extent -1.7,-1.46 0.35,1.55, body extent -1.2,-1.46 1.2,1.46, height 1.2
SOT95P280X110-5N [mm]
  rect 1.25x0.6 smd: 1(-1.25,0.95) 2(-1.25,0) 3(-1.25,-0.95) 4(1.25,-0.95) 5(1.25,0.95)
  silkscreen extent -1.88,-1.45 0.28,1.5, body extent -1.4,-1.45 1.4,1.45, height 0.97
SOT95P280X145-5N [mm]
  rect 1.15x0.6 smd: 1(-1.25,0.95) 2(-1.25,0) 3(-1.25,-0.95) 4(1.25,-0.95) 5(1.25,0.95)
  silkscreen extent -1.83,-1.48 0.33,1.5, body extent -1.4,-1.48 1.4,1.48, height 1.45
SOT-23-OT5_N [mm]
  rect 1.1x0.65 smd: 1(-1.2,0.95) 2(-1.2,0) 3(-1.2,-0.95) 4(1.2,-0.95) 5(1.2,0.95)
  silkscreen extent -1.32,-1.55 0.25,1.95, body extent -0.9,-1.55 0.9,1.55, height 1.45
SS12SDP2 [mm]
  round 1.3 hole 0.8: 1(0,2.54) 2(0,0) 3(0,-2.54)
  silkscreen extent -3.25,-5.1 2,5.1, body extent -2,-5.1 2,5.1, height 4
TP1 [mil]
  round 80 hole 35: 1(0,0)
  silkscreen extent -44,-44 44,44
"USB-B-MICRO-female Tai02" [mm]
  rect 0.4x1.35 smd: 1(1,-2.6) 2(0.35,-2.6) 3(-0.3,-2.6) 4(-0.95,-2.6) 5(-1.6,-2.6)
  oval 1.4x2 hole 1: 5(-3.825,-0.475) 5(3.225,-0.475)
  oval 1.15x1.3 hole 0.7: 5(-2.55,-2.7) 5(1.95,-2.7)
  silkscreen extent -4.5,-3.15 3.95,2.3
WE-TPC_2828 [mm]
  rect 3.2x1 smd: 1(0,1.1) 2(0,-1.1)
  silkscreen extent -1.49,-0.3 1.49,0.3, body extent -1.4,-1.4 1.4,1.4, height 2.82
WE-TPC_4818/482892 [mm]
  rect 2x5.3 smd: 1(-1271.75,-1270) 2(-1268.25,-1270)
  silkscreen extent -1272.49,-1272.8 -1267.51,-1267.2
WE-TPC_381692 [mm]
  rect 1.6x4.3 smd: 1(-1271.356,-1270.014) 2(-1268.644,-1270.014)
  silkscreen extent -1271.87,-1272.18 -1268.13,-1267.82

## Part data
C1 C1_3 C1_4 C1_5 C1_6 C2 C3 C3_3 C3_4 C4 C5 C6 C7 C8 C9 C10 C11 C12 C13 C14 C15 C16 C17 C18 C19 C20 C21 C22 C23 C24 C25 C26 C27 C28 C29 C30 C31 C32 C33 C34 C35 C36 C37 C38 C39 C40 C41 C42 C43 C44 C45 C46 C47 C48 C49 C50 C51 C53 C54 C56 C57 C58 C59 C60 C61 C62 C63 C64 C65 C66 C69 C70 C73 C74 C75 C79 Cn Cn_3 Cn_4 Cn_5: library part CM, "Cap SMD"
C52 C67: "Capacitor 4.7nF", Case="0805 (in)", Manufacturer_Name=Vishay, Mouser Part Number=77-VJ0805Y472KXAMC, Datasheet Link=http://www.vishay.com/docs/45226/vj31xrohsautomlcc.pdf, Height=1.45mm, Manufacturer_Part_Number=VJ0805Y472KXAMC, Mounting Style=SMD/SMT, Mouser Price/Stock=https://www.mouser.co.uk/ProductDetail/Vishay-Vitramon/VJ0805Y472KXAMC?qs=17Xm%252BID41ySvUhElOJjluA%3D%3D
C55 C_test3 C_test4 C_test5 C_test6: library part CM_5, "Cap SMD"
Cn_3a Cn_4a: library part JZ100, "Capacitor", Manufacturer_Name=Knowles, Mouser Part Number=768-JZ100, Datasheet Link=https://www.knowlescapacitors.com/getattachment/4e3ef37f-1910-4b01-89e4-302e57c70f90/JZ-Series.aspx, Height=1.45mm, Manufacturer_Part_Number=JZ100
D1: "Schottky Diode", Manufacturer_Name="ON Semiconductor", Mouser Part Number=512-SS34FA, Datasheet Link=https://componentsearchengine.com/Datasheets/1/SS34FA.pdf, Height=1.43mm, Manufacturer_Part_Number=SS34FA, Mouser Price/Stock=https://www.mouser.com/Search/Refine.aspx?Keyword=512-SS34FA
D1_3 D1_4 D1_5 D1_6 D2_3 D2_4 D2_5 D2_6: "Diode", Manufacturer_Name=onsemi, Mouser Part Number=512-BAS21, Arrow Part Number=BAS21, Arrow Price/Stock=https://www.arrow.com/en/products/bas21/on-semiconductor, Datasheet Link=http://www.onsemi.com/pub/Collateral/BAS21-D.pdf, Height=1.2mm, Manufacturer_Part_Number=BAS21, Mouser Price/Stock=https://www.mouser.co.uk/ProductDetail/ON-Semiconductor-Fairchild/BAS21?qs=GXJjH%252BIVz3MgJ%252Bf2%252BjymzQ%3D%3D
D2: library part EC11FS2, "Diode", Manufacturer_Name=KYOCERA, Mouser Part Number=346-EC11FS2, Datasheet Link=https://www.mouser.jp/datasheet/2/909/EC11FS2-file-1588983.pdf, Height=2.2mm, Manufacturer_Part_Number=EC11FS2
H1: library part "USB B Female Micro/Mini SMD", "USB B Female Micro/Mini SMD"
IC2: "Integrated Circuit", Arrow Part Number="LM2660MX NOPB", Manufacturer_Name="Texas Instruments", Arrow Price/Stock=https://www.arrow.com/en/products/lm2660mxnopb/texas-instruments, Datasheet Link=https://www.ti.com/lit/ds/symlink/lm2660.pdf?ts=1636191506646&ref_url=https%253A%252F%252Fwww.ti.com%252Fstore%252Fti%252Fen%252Fp%252Fproduct%252F%253Fp%253DLM2660MX%252FNOPB, Height=1.75mm, Manufacturer_Part_Number="LM2660MX NOPB"
IC3: "Integrated Circuit", Manufacturer_Name="Texas Instruments", Mouser Part Number=595-TPS72301DDCT, Arrow Part Number=TPS72301DDCT, Arrow Price/Stock=https://www.arrow.com/en/products/tps72301ddct/texas-instruments?region=nac, Datasheet Link=http://www.ti.com/lit/gpn/TPS723, Height=1.1mm, Manufacturer_Part_Number=TPS72301DDCT, Mouser Price/Stock=https://www.mouser.co.uk/ProductDetail/Texas-Instruments/TPS72301DDCT?qs=7z%252BmIopC6%2FL7xVbTZrmV7g%3D%3D
IC4: "Integrated Circuit", Manufacturer_Name=STMicroelectronics, Mouser Part Number=511-LDK130M25R, Arrow Part Number=LDK130M25R, Arrow Price/Stock=https://www.arrow.com/en/products/ldk130m25r/stmicroelectronics, Datasheet Link=http://www.st.com/web/en/resource/technical/document/datasheet/DM00076097.pdf, Height=1.45mm, Manufacturer_Part_Number=LDK130M25R, Mouser Price/Stock=https://www.mouser.com/Search/Refine.aspx?Keyword=511-LDK130M25R
J1 J2 J8: library part JP4, "Connector 4"
J3 J4 J5 J9 J10 J11 J12 J13: "Connector", Manufacturer_Name=Molex, Mouser Part Number=538-171973-0004, Arrow Part Number=171973-0004, Arrow Price/Stock=https://www.arrow.com/en/products/1719730004/molex?region=europe, Datasheet Link=https://www.molex.com/pdm_docs/sd/1719730004_sd.pdf, Height=11.8mm, Manufacturer_Part_Number=171973-0004, Mouser Price/Stock=https://www.mouser.co.uk/ProductDetail/Molex/171973-0004?qs=lc2O%252BfHJPVaHyBdhjsB7Nw%3D%3D
J6: library part "JP 2"
J7: "10 _8 + 2_ Position Card Connector Secure Digital - microSDâ„¢ Surface Mount, Right Angle Gold", Package=None, Availability=Unavailable, MF=Molex, MP=502570-0893, Price=None, SnapEDA_Link=https://www.snapeda.com/parts/502570-0893/Molex/view-part/225170/?ref=snap
J14: "Connector", Manufacturer_Name=Hirose, Manufacturer_Part_Number=DF11-20DP-2DSA(01), Mouser Part Number=798-DF11-20DP-2DSA01, Datasheet Link=https://www.hirose.com/en/product/document?clcode=CL0543-0525-3-01&productname=DF11-20DP-2DSA(01)&series=DF11&documenttype=2DDrawing&lang=en&documentid=0000995343, Height=7.1mm, Mouser Price/Stock=https://www.mouser.co.uk/ProductDetail/Hirose-Connector/DF11-20DP-2DSA01?qs=Ux3WWAnHpjAvHkbqZ9K7Yg%3D%3D
L1: library part 744031001, "Inductor", Manufacturer_Name="Wurth Elektronik", Mouser Part Number=710-744031001, Manufacturer_Part_Number=744031001, Mouser Price/Stock=https://www.mouser.co.uk/ProductDetail/Wurth-Elektronik/744031001?qs=PGXP4M47uW5omdHfp5PCig%3D%3D
L2 L5: library part 744042003, "Inductor", Manufacturer_Name="Wurth Elektronik", Mouser Part Number=710-744042003, Manufacturer_Part_Number=744042003, Mouser Price/Stock=https://www.mouser.co.uk/ProductDetail/Wurth-Elektronik/744042003?qs=PGXP4M47uW67fekbtUi6HQ%3D%3D
L3: library part 744025100, "SMT Shielded Tiny Power Inductor WE-TPC, size 2828, 10 uH, 1 A", DC Resistance max.="190 mOhm", Inductance="10 uH", Operating Temperature="-40 to +125 degC", Rated Current="1 A", Saturation Current="1.1 A", Self Resonant Frequency="41 MHz", ComponentLink1Description=Manufacturer, ComponentLink1URL=http://www.we-online.de, ComponentLink2Description=Datasheet, ComponentLink2URL=https://katalog.we-online.com/pbs/datasheet/744025100.pdf, Mounting Technology=SMT, Packaging="Tape and Reel", Part Number=744025100, Published Date="December 2018", Publisher="Wurth Elektronik", Size=2828
L4: library part 744025150, "SMT Shielded Tiny Power Inductor WE-TPC, size 2828, 15 uH, 0.72 A", DC Resistance max.="400 mOhm", Inductance="15 uH", Operating Temperature="-40 to +125 degC", Rated Current="0.72 A", Saturation Current="0.9 A", Self Resonant Frequency="32 MHz", ComponentLink1Description=Manufacturer, ComponentLink1URL=http://www.we-online.de, ComponentLink2Description=Datasheet, ComponentLink2URL=https://katalog.we-online.com/pbs/datasheet/744025150.pdf, Mounting Technology=SMT, Packaging="Tape and Reel", Part Number=744025150, Published Date="December 2018", Publisher="Wurth Elektronik", Size=2828
LED1 LED2 LED3: "LED Single colour Green and Red"
M1: "MDBT42Q"
R1 R1_3 R1_4 R1_5 R1_6 R2 R2_3 R2_4 R2_5 R2_6 R3_3 R3_4 R5 R6 R7 R8 R9 R10 R11 R12 R13 R14 R15 R16 R17 R18 R19 R20 R21 R22 R23 R24 R25 R26 R27 R28 R29 Rb_3 Rb_4 Rb_5 Rb_6 Rc_3 Rc_4 Rc_5 Rc_6 Rn1 Rn1_3 Rn1_4 Rn1_5 Rn2 Rn2_3 Rn2_4 Rn2_5: library part R, "Resistor 1/4W"
R3 R4: "Resistor 4.99k", Case="0805 (in)", Manufacturer_Name=Panasonic, Datasheet Link=http://industrial.panasonic.com/cdbs/www-data/pdf/RDQ0000/ast-ind-151033.pdf, Height=0.7mm, Manufacturer_Part_Number=ERJ-HP6D4991V, Mounting Style=SMD/SMT
Rn_3 Rn_4: "Resistor", Manufacturer_Name=Bourns, Mouser Part Number=652-3224X-1-105E, Arrow Part Number=3224X-1-105E, Arrow Price/Stock=https://www.arrow.com/en/products/3224x-1-105e/bourns?region=nac, Datasheet Link=https://www.bourns.com/docs/Product-Datasheets/3224.pdf, Height=5mm, Manufacturer_Part_Number=3224X-1-105E, Mouser Price/Stock=https://www.mouser.co.uk/ProductDetail/Bourns/3224X-1-105E?qs=tEaODSGlU8OES45Zo8R5qQ%3D%3D
S1: "Switch", Manufacturer_Name="NKK Switches", Mouser Part Number=633-SS12SDP2, Datasheet Link=https://componentsearchengine.com/Datasheets/1/SS12SDP2.pdf, Height=4mm, Manufacturer_Part_Number=SS12SDP2, Mouser Price/Stock=https://www.mouser.com/Search/Refine.aspx?Keyword=633-SS12SDP2
TP5 TP6 TP7 TP8 TP9 TP10: library part TP1, "Test Point"
U1: "Miniature Single-Cell, Fully Integrated Li-Ion, Li-Polymer Charge Management Controller, 4.2V, 5-Pin SOT-23, Industrial Temperature, Tape and Reel", Supplier Part Number 1=MCP73832T-2ACI/OTTR-ND, Code_IPC=SOT23-5, ComponentLink1Description=Datasheet, ComponentLink1URL=http://ww1.microchip.com/downloads/en/DeviceDoc/21984e.pdf, ComponentLink2Description="Packaging Specification", ComponentLink2URL=http://www.microchip.com/stellent/groups/techpub_sg/documents/packagingspec/en012702.pdf, ComponentLink3Description="Microchip.com Home", ComponentLink3URL=http://www.microchip.com/, DatasheetVersion="revE, Sep-2008", LatestRevisionDate=27-Nov-2009, LatestRevisionNote="Updated to datasheet revision E, Sep-2008", PackageDescription="5-Lead Plastic Small Outline Transistor (OT) [SOT-23]", PackageReference=SOT-23-OT5, PackageVersion="revBB, Aug-2009", Published=29-Jan-2009, Publisher="Altium Limited", Supplier 1=Digi-Key, Supplier 2=Digi-Key, Supplier 3=Digi-Key, Supplier 4=Farnell, Supplier Part Number 2=MCP73832T-2ACI/OTCT-ND, Supplier Part Number 3=MCP73832T-2ACI/OTDKR-ND, Supplier Part Number 4=1332159
U2: library part ADS1299IPAGR, "No Description Available", Built_By=EMA_UL_Team, Copyright="Copyright (C) 2018 Accelerated Designs. All rights reserved", Manufacturer_Part_Number=ADS1299IPAGR, RefDes=RefDes, Type=DEV, Vendor="Texas Instruments"
U3: "No Description Available", Built_By=EMA_UL_Team, Copyright="Copyright (C) 2018 Accelerated Designs. All rights reserved", Manufacturer_Part_Number=OPA2376AIDR, RefDes=RefDes, Type=DEV, Vendor="Texas Instruments"
U4: library part TPS63060DSCR, "No Description Available", Manufacturer="Texas Instruments", Built_By=EMA_UL_Team, Copyright="Copyright (C) 2018 Accelerated Designs. All rights reserved", Manufacturer_Part_Number=TPS63060DSCR, RefDes=RefDes, Type=DEV, Vendor="Texas Instruments"
U6 U7 U8 U9: library part OPA2277U, "10V, 0.1V/?C, High-Precision, Low-Power Operational Amplifier 8-SOIC", Package="SOIC-8 Texas Instruments", Availability=Good, Check_prices=https://www.snapeda.com/parts/OPA2277U/Texas%20Instruments/view-part/9572/?ref=eda, MF="Texas Instruments", MP=OPA2277U, Price=None, Purchase-URL=https://pricing.snapeda.com/search/part/OPA2277U/?ref=eda, SnapEDA_Link=https://www.snapeda.com/parts/OPA2277U/Texas%20Instruments/view-part/9572/?ref=snap
X1: library part Crystal, "Crystal For all Crystal 2pin."

## Free pads (board coordinates)
  round 14 hole 12: 1(63.198,114.554)
  round 16 hole 12: 1N(180,130) 1P(180,95)
  round 24 smd far side: 2N(140,40) 2P(190,40) 3N(40,40) 3P(90,40)

## Via types
v1: diameter 0.5, hole 0.3, Top Layer to Bottom Layer, 24 vias
v2: diameter 0.5, hole 0.3, Signal Layer 1 to Bottom Layer, 10 vias
v3: diameter 0.5, hole 0.3, Top Layer to Signal Layer 1, 9 vias
v4: diameter 0.7, hole 0.3, Top Layer to Bottom Layer, 6 vias
v5: diameter 0.7, hole 0.4, Top Layer to Signal Layer 1, 3 vias
v6: diameter 0.7, hole 0.4, Top Layer to Bottom Layer, 1 vias
v7: diameter 0.7, hole 0.3, Top Layer to Signal Layer 1, 1 vias
v8: diameter 0.7, hole 0.3, Signal Layer 1 to Bottom Layer, 1 vias

## Nets (pads, with @x,y where several pads share a name; then routed paths per layer and width w, separated by ;. In a path a pad name is that pad's centre, name@x,y a point inside that pad or via, vN(x,y) a via of type N, cw(c..) or ccw(c..) an arc to the next point about the centre after c; other vN are vias at no path point)
+2.5V: C1.2 C3.2 C12.1 C26.2 C27.2 C32.2 C33.2 C34.2 C35.2 C49.2 C50.2 C57.2 C61.2 C65.2 C66.2 C73.2 C75.2 J5.4 J9.4 J12.4 J13.4 J14.6 J14.12 J14.14 J14.20 L5.2 Pad1.1 Pad2.4 Pad3.1 Pad4.4 TP5.1 TP10.1 U2.17 U2.19 U2.21 U2.22 U2.54 U2.56 U2.59 U3.6 U3.7 U3.8 U6.8 U7.8 U8.8 U9.8 | length 299.8
  Top Layer w0.3: C35.2@76.964,111.648 ccw(c77.162,111.648) 77.162,111.45 82.824,111.45 ; U2.56@81.336,112.95 82.824,112.95 ccw(c82.824,113.45) 83.324,113.45 ; U2.54@81.336,113.95 82.824,113.95 cw(c82.824,113.45) 83.324,113.45 ; U2.17@92.812,108.95 94.638,108.95 cw(c94.638,106.426) 94.763,108.947 ; U2.22@92.812,111.45 U2.21@92.812,110.95 93.683,110.95 cw(c93.683,110.45) 94.183,110.45 ; C27.2@96.469,108.211 96.422,108.211 ccw(c94.638,106.426) 94.763,108.947 ; 82.824,111.45 ccw(c82.824,111.95) 83.324,111.95 83.324,113.45 ; 82.824,111.45 cw(c82.824,110.95) 83.324,110.95 83.324,110.536 ccw(c84.909,110.536) 84.909,108.95 v4(89.324,108.95) 93.662,108.95 ccw(c93.662,109.423) 94.135,109.423 ccw(c93.608,109.423) 93.608,109.95 U2.19@92.812,109.95 93.683,109.95 ccw(c93.683,110.45) 94.183,110.45 ; 94.183,110.45 ccw(c96.422,110.45) 94.763,108.947
  Top Layer w0.4: U6.8@86.53,36.595 C57.2@83.878,36.595 C65.2@81.592,36.595 81.592,45.626 cw(c82.906,45.626) 82.906,46.939 89.743,46.939 ccw(c89.743,49.479) 91.539,47.683 93.006,49.15 ccw(c91.21,50.946) 93.75,50.946 Pad3.1@93.75,53 ; C75.2@175.75,38.095 C3.2@178.833,38.095 ; U9.8@182.03,38.095 C3.2@178.833,38.095 ; Pad1.1@193.75,53 193.75,49.961 cw(c192.71,49.961) 192.71,48.92 179.73,48.92 ccw(c179.73,46.914) 177.724,46.914 177.724,39.204 ccw(c178.833,39.204) C3.2@178.833,38.095
  Top Layer w0.5: Pad4.4@36.25,53 35.383,53 ccw(c35.383,50.46) 33.587,52.256 30.081,48.75 ccw(c31.877,46.954) 29.337,46.954 29.337,37.795 ccw(c30.537,37.795) 30.537,36.595 C73.2@31.592,36.595 C61.2@33.878,36.595 U7.8@36.53,36.595 ; U3.6@63.198,100.422 U3.7@64.468,100.422 64.468,101.602 cw(c65.738,101.602) 65.738,102.872 70.241,102.872 cw(c70.241,102.756) TP5.1@70.358,102.756 ; C12.1@65.738,97.727 U3.8@65.738,100.422 ; U8.8@132.03,38.095 C66.2@128.833,38.095 C1.2@125.75,38.095 125.75,44.865 cw(c128.29,44.865) 126.494,46.661 132.089,52.256 cw(c133.885,50.46) 133.885,53 Pad2.4@136.25,53
  Top Layer w1.2: TP10.1@57.413,131.897 58.955,130.355 ccw(c60.751,132.151) 60.751,129.611 C50.2@61.316,129.611 ; C49.2@61.316,127.61 C50.2@61.316,129.611 ; L5.2@66.015,129.611 C50.2@61.316,129.611
  Bottom Layer w0.5: J14.20@66.149,91.516 66.149,100.216 cw(c68.689,100.216) 68.689,102.756 TP5.1@70.358,102.756 ; J14.12@74.149,91.516 J14.14@72.149,91.516 72.149,100.964 ccw(c70.358,100.964) TP5.1@70.358,102.756 ; J14.6@80.149,91.516 80.149,100.216 ccw(c77.609,100.216) 77.609,102.756 75.364,102.756 ; v4(89.324,108.95) 83.662,108.95 ccw(c83.662,106.41) 81.866,108.206 77.16,103.5 cw(c75.364,105.296) 75.364,102.756 ; TP5.1@70.358,102.756 75.364,102.756
  Bottom Layer w1.2: TP10.1@57.413,131.897 53.391,131.897 ccw(c53.391,129.357) 50.851,129.357 50.851,105.296 ccw(c53.391,105.296) 53.391,102.756 TP5.1@70.358,102.756
+IN_A5: C55.2 Cn_5.2 D1_5.1 D2_5.3 J4.3 U6.3 | length 14
  Top Layer w0.3: U6.3@91.47,39.135 C55.2@96.381,39.135 D1_5.1@96.381,36.276 D2_5.3@99.47,36.276 Cn_5.2@102.646,36.276
+IN_A6: C59.1 Cn.2 D1_6.1 D2_6.3 J10.3 U7.3 | length 14
  Top Layer w0.3: U7.3@41.47,39.135 C59.1@46.381,39.135 D1_6.1@46.381,36.276 D2_6.3@49.47,36.276 Cn.2@52.646,36.276
+IN_B3: C3_3.1 J13.1 R3_3.2 U9.5 | length 5
  Top Layer w0.5: U9.5@182.03,41.905 R3_3.2@182.03,44.964 C3_3.1@183.964,44.964
+IN_B4: C3_4.1 J9.1 R3_4.2 U8.5 | length 6.8
  Top Layer w0.5: U8.5@132.03,41.905 ccw(c132.03,43.839) 133.964,43.839 C3_4.1@133.964,44.964 R3_4.2@133.964,47.625
+IN_B5: C56.1 J5.1 R23.2 U6.5 | length 5.2
  Top Layer w0.5: R23.2@86.505,45.541 86.505,40.43 ccw(c86.53,40.43) U6.5@86.53,40.405
+IN_B6: C60.1 J12.1 R25.2 U7.5 | length 5.1
  Top Layer w0.5: U7.5@36.53,40.405 C60.1@36.53,43.077 R25.2@36.53,45.541
-2.5V: C2.2 C4.2 C13.2 C20.2 C21.1 C22.2 C23.1 C24.1 C25.1 C26.1 C27.1 C28.2 C29.2 C32.1 C33.1 C45.2 C58.2 C62.2 C69.2 C70.2 C74.2 C79.2 J3.4 J4.4 J10.4 J11.4 J14.8 J14.10 J14.16 J14.18 L2.2 Pad1.4 Pad2.1 Pad3.4 Pad4.1 TP9.1 U2.20 U2.23 U2.25 U2.32 U2.53 U2.57 U2.58 U3.4 U6.4 U7.4 U8.4 U9.4 | length 236.6
  Top Layer w0.3: C24.1@76.964,113.81 77.512,113.325 80.453,112.45 U2.57@81.336,112.45 U2.58@81.336,111.95 ; U2.53@81.336,114.45 84.486,114.45 cw(c84.486,111.91) 86.282,113.706 86.294,113.694 ; 86.354,113.634 86.294,113.694 ; U2.20@92.812,110.45 91.761,110.45 cw(c91.761,111.674) 90.536,111.674 ; U2.23@92.812,111.95 90.898,111.95 ; U2.32@92.812,116.45 91.351,116.45 ccw(c91.351,115.635) 90.536,115.635 90.536,112.95 ; C20.2@96.215,112.95 cw(c96.215,112.696) C20.2@96.469,112.696 ccw(c95.856,112.083) 95.856,112.95 U2.25@92.812,112.95 90.536,112.95 ; 86.294,113.694 ccw(c88.09,115.49) 88.09,112.95 90.536,112.95 ; 90.536,111.674 cw(c90.812,111.674) 90.812,111.95 90.898,111.95 ; 90.536,111.674 90.536,112.312 ; 90.536,112.312 ccw(c90.898,112.312) 90.898,111.95 ; 90.536,112.312 90.536,112.95
  Top Layer w0.5: U7.4@41.47,40.405 C74.2@41.47,43.077 C62.2@41.47,45.541 41.47,46.501 cw(c43.489,46.501) 42.061,47.929 43.006,48.873 ccw(c41.21,50.67) 43.75,50.67 Pad4.1@43.75,53 ; C13.2@59.03,105.349 U3.4@61.928,105.349 ; Pad3.4@86.25,53 86.25,53.365 cw(c88.79,53.365) 88.79,55.905 93.777,55.905 cw(c93.777,53.365) 96.317,53.365 96.317,51.217 cw(c93.777,51.217) 95.573,49.421 94.5,48.348 ccw(c96.296,46.552) 93.756,46.552 C69.2@93.756,45.566 C58.2@93.756,43.102 93.756,42.691 cw(c91.47,42.691) U6.4@91.47,40.405 ; U8.4@136.97,41.905 137.21,41.905 ccw(c137.21,44.445) 139.75,44.445 C2.2@139.75,44.964 139.75,46.724 cw(c142.29,46.724) 140.494,48.521 143.006,51.033 ccw(c141.21,52.829) 143.75,52.829 Pad2.1@143.75,53 ; Pad1.4@186.25,53 186.207,54.355 186.207,54.362 cw(c187.464,54.442) 187.464,55.702 194.031,55.702 cw(c194.031,54.153) 195.58,54.153 195.58,50.165 cw(c193.04,50.165) 193.04,47.625 190.125,47.625 ccw(c190.125,47.25) C79.2@189.75,47.25 C4.2@189.75,44.964 189.75,44.445 cw(c187.21,44.445) 187.21,41.905 U9.4@186.97,41.905
  Top Layer w0.8: C20.2@96.469,112.696 C33.1@98.793,112.696 C32.1@101.091,112.696
  Top Layer w1.2: v4(72.24,111.95) C28.2@72.24,113.81 C25.1@74.589,113.81 C24.1@76.964,113.81
  Signal Layer 1 w0.8: TP9.1@54.686,95.86 v2(70.149,95.86) v8(74.574,95.86) 75.463,95.86 ccw(c75.463,97.511) 77.114,97.511 77.114,109.41 ccw(c74.574,109.41) 74.574,111.95
  Signal Layer 1 w1.2: v4(72.24,111.95) 74.574,111.95 96.688,111.95 ; v5(98.883,104.266) 98.883,109.754 ccw(c96.688,109.754) 96.688,111.95 ; v6(102.882,113.501) cw(c101.33,113.501) 101.33,111.95 96.688,111.95
  Bottom Layer w0.8: J14.18@68.149,91.516 68.149,93.86 cw(c70.149,93.86) v2(70.149,95.86) J14.16@70.149,91.516 ; J14.10@76.149,91.516 76.149,94.285 ccw(c74.574,94.285) v8(74.574,95.86) 75.609,95.86 cw(c75.609,93.32) 78.149,93.32 J14.8@78.149,91.516
-IN_B5: C56.2 R1_5.1 R2_5.2 R24.2 Rc_5.1 U6.2 | length 28.6
  Top Layer w0.3: R2_5.2@83.878,30.96 Rc_5.1@86.795,30.96 ; C56.2@88.816,43.077 88.816,39.557 ccw(c90.508,39.557) 90.508,37.865 U6.2@91.47,37.865 ccw(c91.47,35.557) 89.162,35.557 89.162,34.442 cw(c87.993,34.442) 87.993,33.274 ccw(c87.993,32.076) 86.795,32.076 Rc_5.1@86.795,30.96 ; R1_5.1@92.896,28.106 R24.2@86.795,28.106 Rc_5.1@86.795,30.96
-IN_B6: C60.2 R1_6.1 R2_6.2 R26.2 Rc_6.1 U7.2 | length 28.6
  Top Layer w0.3: R2_6.2@33.878,30.96 Rc_6.1@36.795,30.96 ; 37.75,33.237 ccw(c37.75,32.282) 36.795,32.282 Rc_6.1@36.795,30.96 ; 37.75,33.237 ccw(c37.75,34.568) 39.081,34.568 39.081,35.476 cw(c41.47,35.476) U7.2@41.47,37.865 40.402,37.865 cw(c40.402,39.451) 38.816,39.451 C60.2@38.816,43.077 ; R1_6.1@42.896,28.106 R26.2@36.795,28.106 Rc_6.1@36.795,30.951 Rc_6.1@36.795,30.96